# Altium PCB bmsSlave.PcbDoc (part 1 of 2)
Units mil, origin at the board's own origin, x right, y up, seen from the top; angles counter-clockwise.
Board outline 5031.62 x 7216.44 mil, 2 copper layers (Top Layer, Bottom Layer); 233 components, 161 nets, 594 pads, 117 vias.
Unrouted connection lines stored in the file: 5.
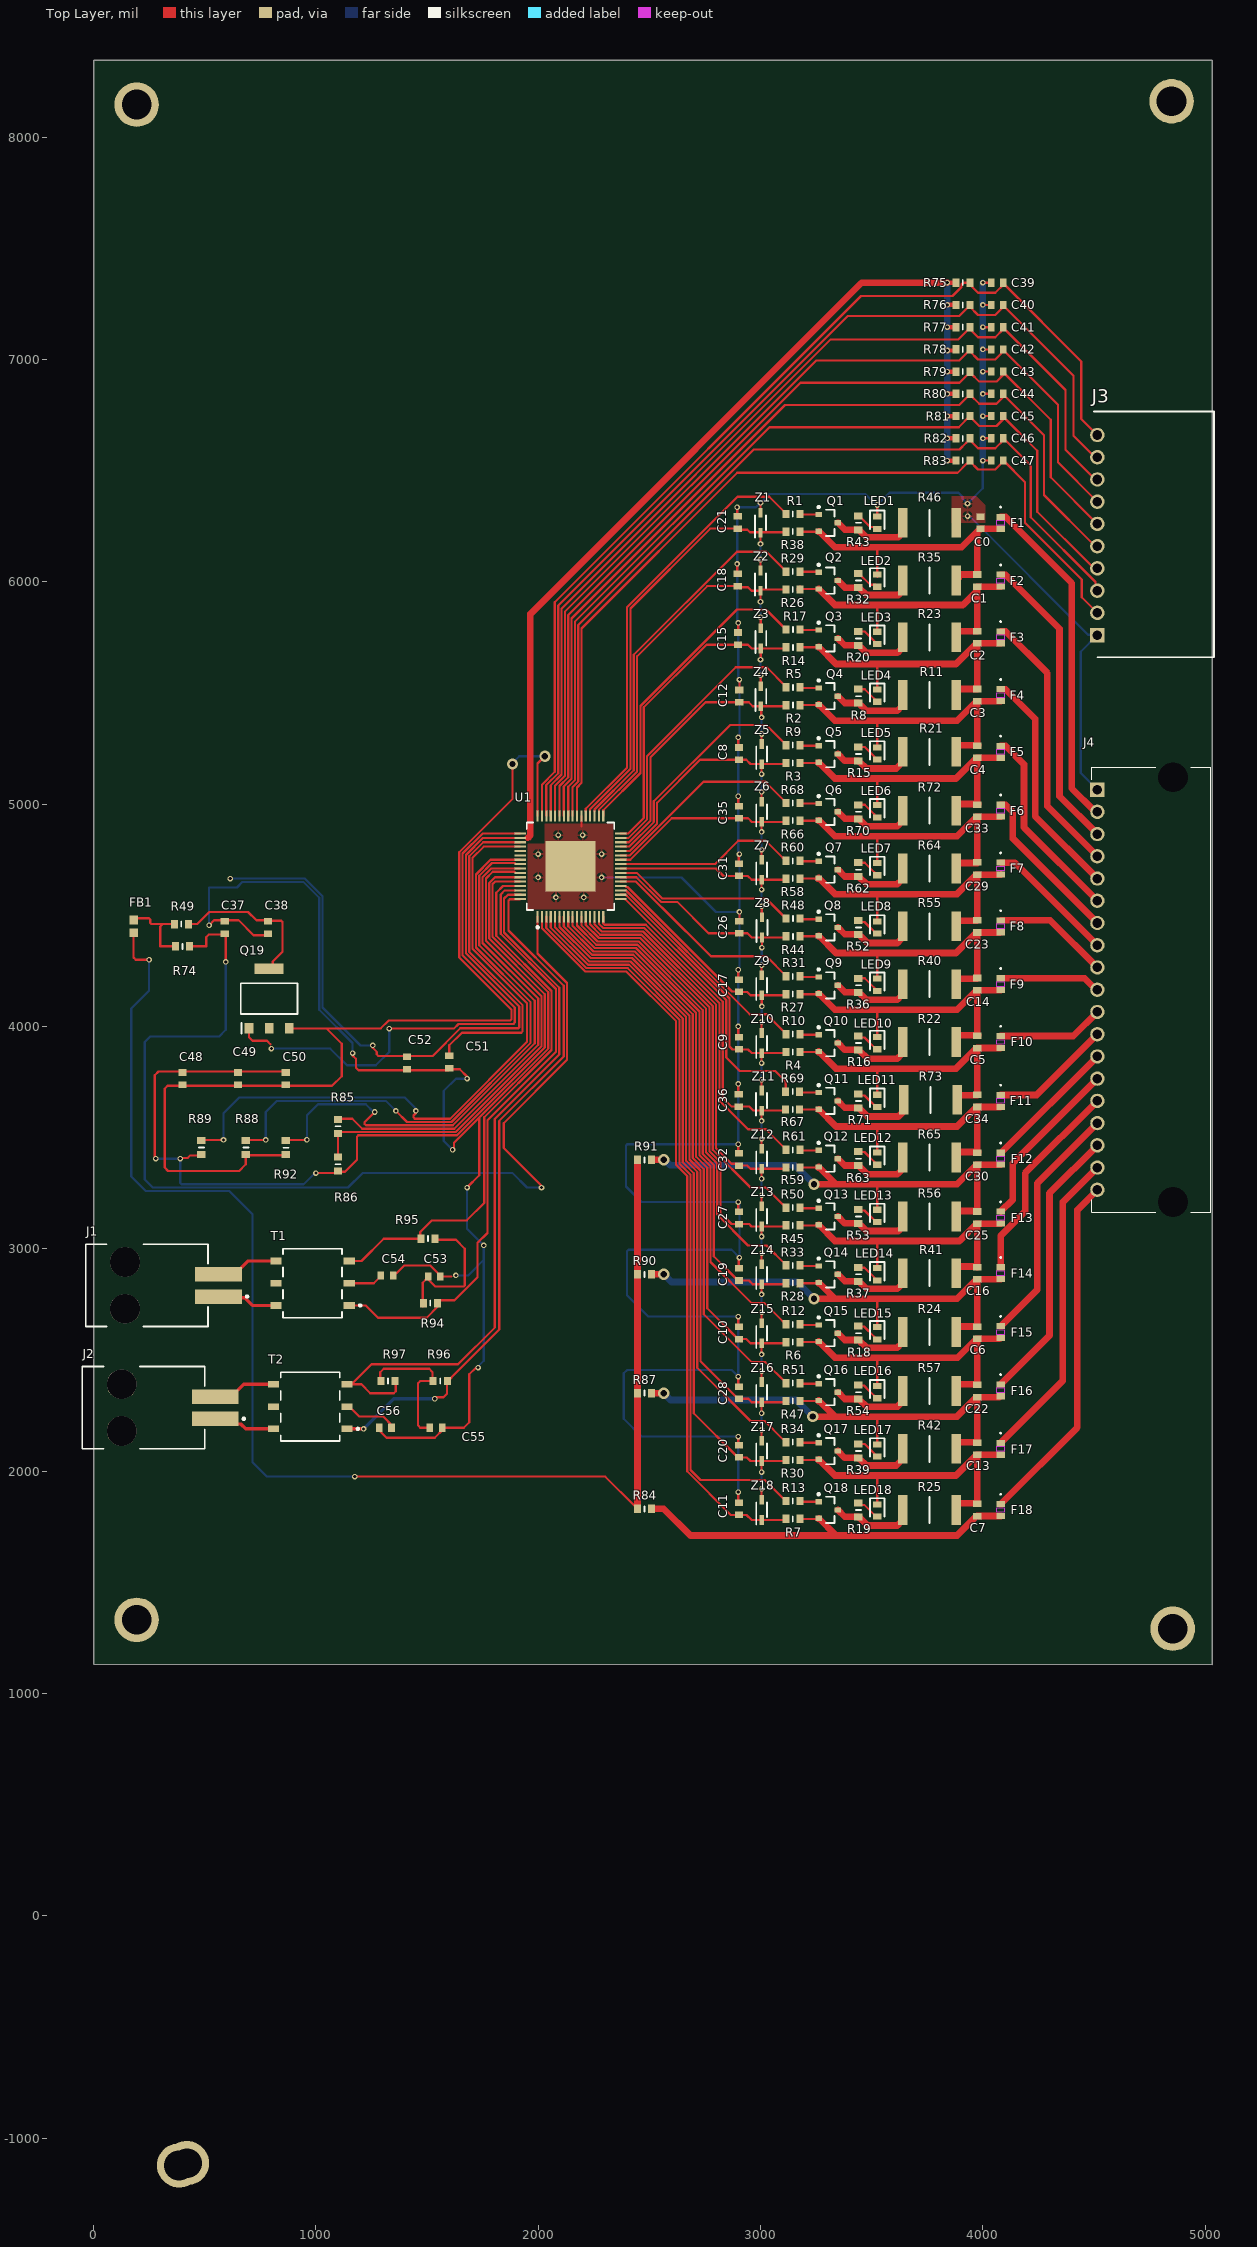
[diagram p0: Top Layer view]
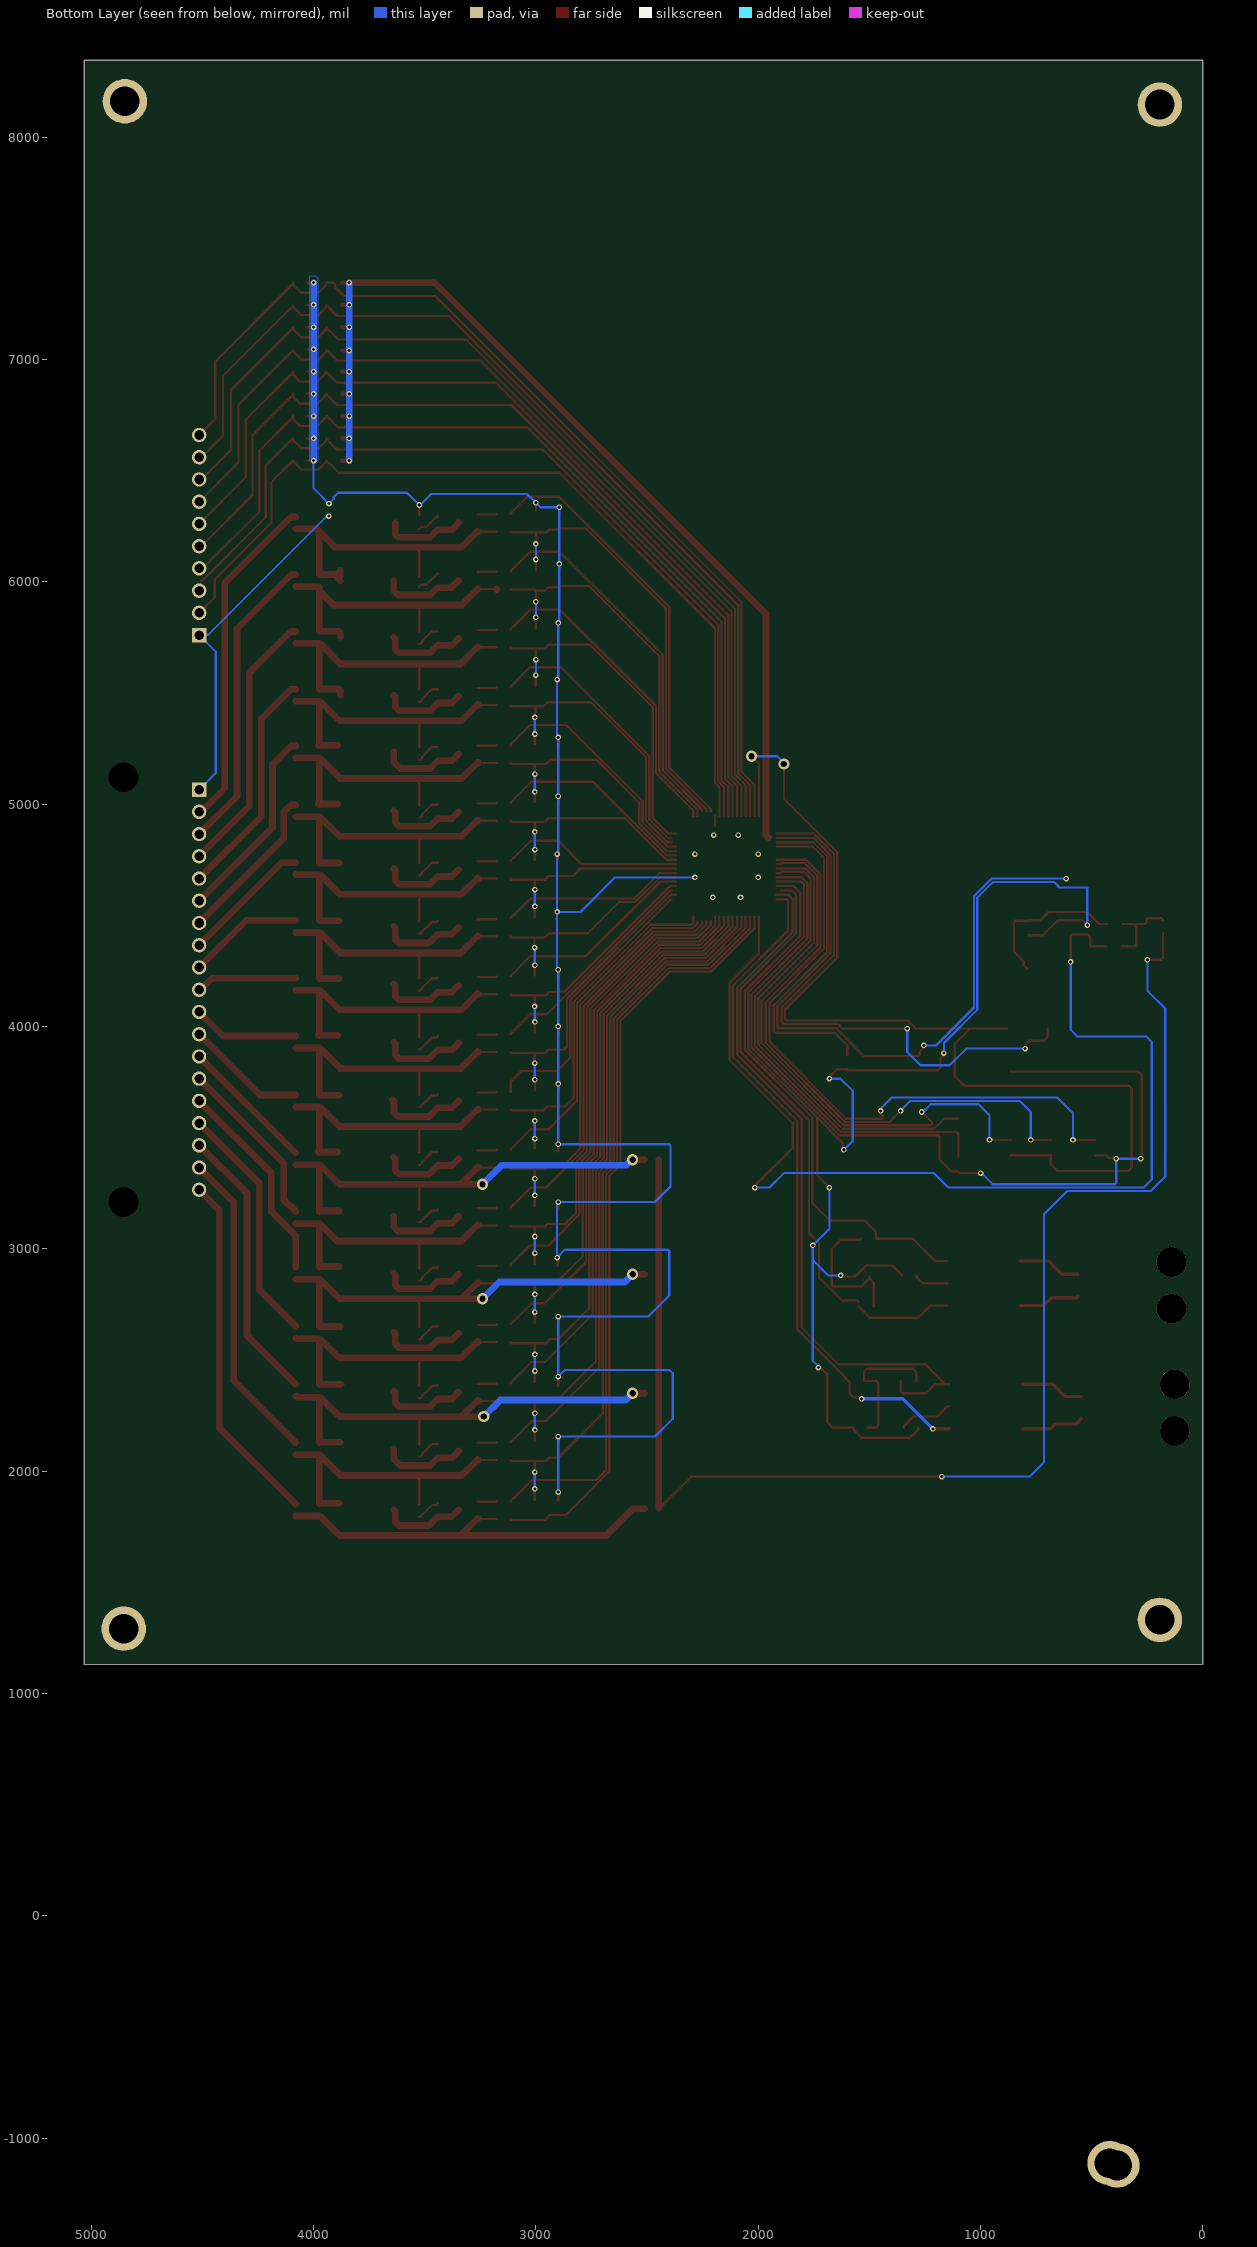
[diagram p1: Bottom Layer view, seen from below]
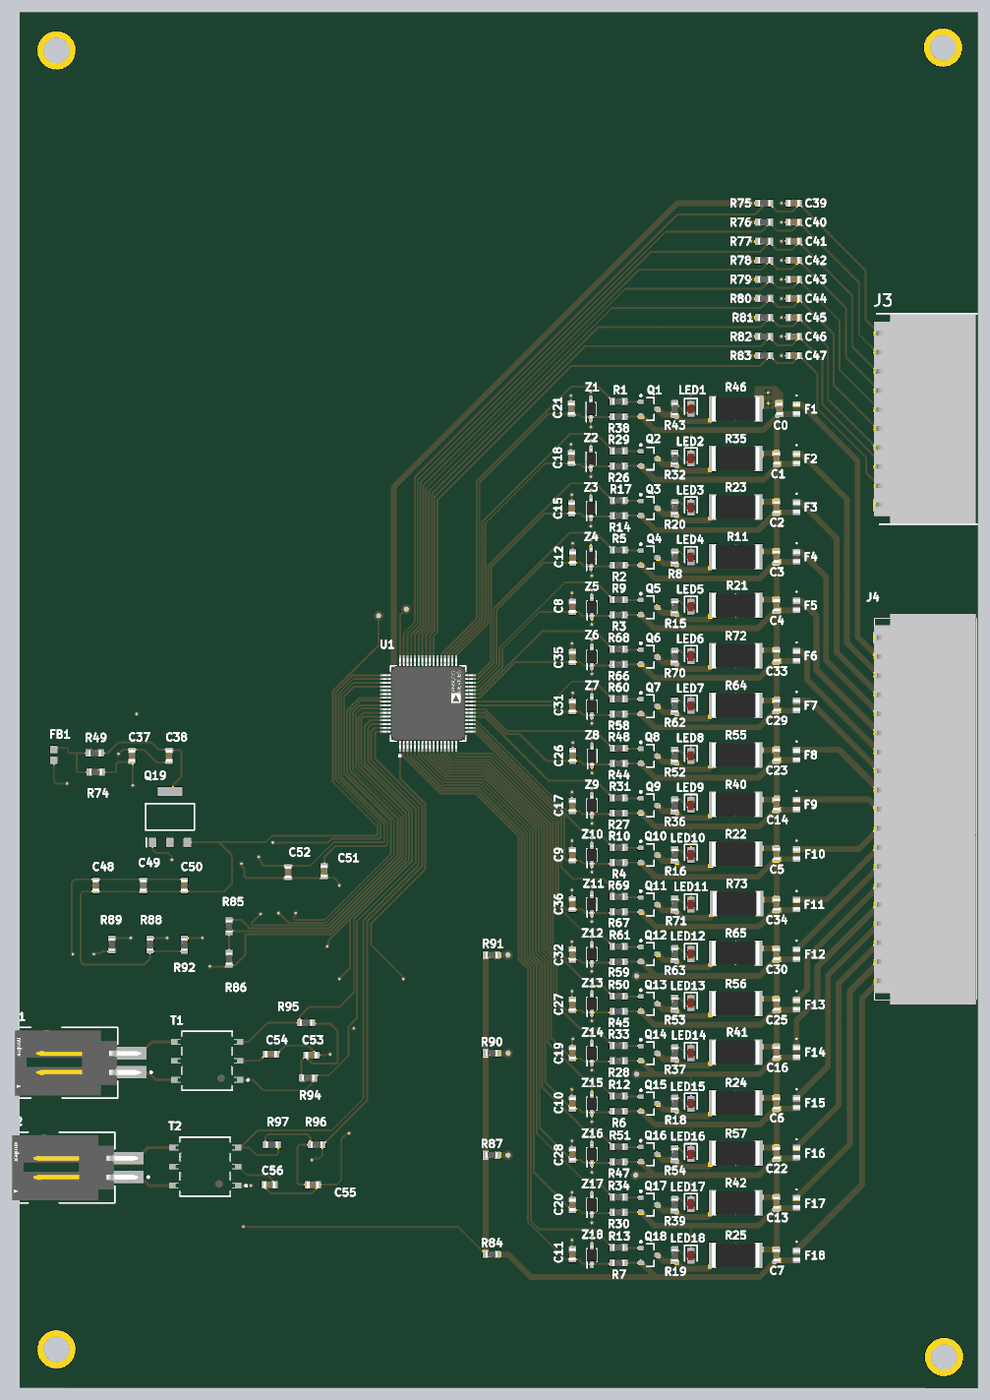
[diagram p3: 3D render of the assembled board from above, using the file's embedded part models]

## Layer stack, top to bottom
Top Solder: solder mask 0.4, Solder Resist, Dk 3.5
Top Layer: signal copper 1.4
Dielectric 1: dielectric 12.6, FR-4, Dk 4.8
Bottom Layer: signal copper 1.4
Bottom Solder: solder mask 0.4, Solder Resist, Dk 3.5

## Board outline
0,1130 0,8345 5031.62,8345 5031.62,1128.56

## Design rules (kind name [scope] priority, off if disabled: settings)
Clearance [All] p1: gap=10 ignorepadtopadclearanceinfootprint=FALSE except(0: Arc-Hole Track-Poly Track-Region Track-Hole SMDPad-Poly SMDPad-Region SMDPad-Hole THPad-Hole Via-Hole Fill-Hole Poly-Hole Region-Hole Text-Hole; 2: Arc-SMDPad Track-SMDPad; 3: SMDPad-SMDPad SMDPad-THPad THPad-THPad; 5: Arc-Arc Arc-Track Track-Track)
DiffPairsRouting [All] p1: maxlimit=10 minlimit=10 mostfreqgap=10 toplayer_minwidth=15 toplayer_maxwidth=15 toplayer_prefwidth=15 bottomlayer_minwidth=15 bottomlayer_maxwidth=15 bottomlayer_prefwidth=15 maxuncoupledlength=500
PolygonConnect [All] p1: thpad.connectstyle=Direct thpad.reliefconductorwidth=10 thpad.reliefentries=4 thpad.polygonreliefangle="90 Angle" thpad.airgapwidth=10 smdpad.connectstyle=Direct smdpad.reliefconductorwidth=10 smdpad.reliefentries=4 smdpad.polygonreliefangle="90 Angle" smdpad.airgapwidth=10 via.connectstyle=Relief via.reliefconductorwidth=10 via.reliefentries=4 via.polygonreliefangle="90 Angle" via.airgapwidth=10
RoutingVias [All] p1: holewidth=28 width=50 viastyle="Through Hole" minholewidth=28 minwidth=50 maxholewidth=28 maxwidth=50
SolderMaskExpansion SolderMaskExpansion_Via [IsVia] p1: expansion=4 istentingtop=TRUE
SolderMaskExpansion [All] p2: expansion=4 istentingtop=FALSE
Width [All] p1: maxlimit=30 minlimit=10 preferedwidth=10 minimp=50.000000 maximp=50.000000 favimp=50.000000
29 further rules are at their usual default settings.

## Classes and differential pairs
component class bmsSlave_main: C37 C38 C39 C40 C41 C42 C43 C44 C45 C46 C48 C49 C50 C51 C52 FB1 Q19 R49 R74 R75 R76 R77 R78 R79 R80 R81 R82 R83 R84 R85 R86 R87 R88 R89 R90 R91 R92
component class bmsSlave_isospi: C53 C54 C55 C56 R94 R95 R96 R97 T1 T2
component class bmsSlave_conn: J1 J2 J3 J4
component class bmsSlave_cells: C0 C1 C2 C3 C4 C5 C6 C7 C8 C9 C10 C11 C12 C13 C14 C15 C16 C17 C18 C19 C20 C21 C22 C23 C25 C26 C27 C28 C29 C30 C31 C32 C33 C34 C35 C36 C57 D1 D2 D3 D4 D5 D6 D7 D8 D9 D10 D11 D12 D13 D14 D15 D16 D17 D18 F1 F2 F3 F4 F5 F6 F7 F8 F9 F10 F11 F12 F13 F14 F15 F16 F17 F18 LED1 LED2 LED3 LED4 LED5 LED6 LED7 LED8 LED9 LED10 LED11 LED12 LED13 LED14 LED15 LED16 LED17 LED18 Q1 Q2 Q3 Q4 Q5 Q6 Q7 Q8 Q9 Q10 Q11 Q12 Q13 Q14 Q15 Q16 Q17 Q18 R1 R2 R3 R4 R5 R6 R7 R8 R9 R10 R11 R12 R13 R14 R15 R16 R17 R18 R19 R20 R21 R22 R23 R24 R25 R26 R27 R28 R29 R30 R31 R32 R33 R34 R35 R36 R37 R38 R39 R40 R41 R42 R43 R44 R45 R46 R47 R48 R50 R51 R52 R53 R54 R55 R56 R57 R58 R59 R60 R61 R62 R63 R64 R65 R66 R67 R68 R69 R70 R71 R72 R73 Z1 Z2 Z3 Z4 Z5 Z6 Z7 Z8 Z9 Z10 Z11 Z12 Z13 Z14 Z15 Z16 Z17 Z18
differential pair ISO_xA_B: +ISO_xA_B_P -ISO_xA_B_N
differential pair ISO_xA_A: +ISO_xA_A_P -ISO_xA_A_N
differential pair ISO_Ix_B: +ISO_Ix_B_P -ISO_Ix_B_N
differential pair ISO_Ix_A: +ISO_Ix_A_P -ISO_Ix_A_N

## Components (designator, comment, footprint, x,y, rotation, side; value= is the part's Value field where it differs from the comment)
C0 "885382207009" C0603 3990,6265 r270 top
C1 "885382207009" C0603 3975,6005 r270 top
C2 "885382207009" C0603 3975,5750 r270 top
C3 "885382207009" C0603 3975,5490 r270 top
C4 "885382207009" C0603 3975,5235 r270 top
C5 "885382207009" C0603 3975,3930 r270 top
C6 "885382207009" C0603 3975,2622.44 r270 top
C7 "885382207009" C0603 3975,1825 r270 top
C8 "885382207009" C0603 2902.72,5226.94 r270 top
C9 "885382207009" C0603 2902.72,3923.89 r270 top
C10 "885382207009" C0603 2902.72,2621.11 r270 top
C11 "885382207009" C0603 2902.72,1830.28 r270 top
C12 "885382207009" C0603 2904.21,5485.56 r270 top
C13 "885382207009" C0603 3975,2100 r270 top
C14 "885382207009" C0603 3975,4190 r270 top
C15 "885382207009" C0603 2899.21,5744.17 r270 top
C16 "885382207009" C0603 3975,2890 r270 top
C17 "885382207009" C0603 2902.72,4182.5 r270 top
C18 "885382207009" C0603 2897.72,6007.78 r270 top
C19 "885382207009" C0603 2902.72,2884.72 r270 top
C20 "885382207009" C0603 2902.72,2088.89 r270 top
C21 "885382207009" C0603 2897.72,6266.39 r270 top
C22 "885382207009" C0603 3975,2360 r270 top
C23 "885382207009" C0603 3975,4450 r270 top
C25 "885382207009" C0603 3975,3140 r270 top
C26 "885382207009" C0603 2904.21,4446.11 r270 top
C27 "885382207009" C0603 2902.72,3138.33 r270 top
C28 "885382207009" C0603 2902.72,2352.5 r270 top
C29 "885382207009" C0603 3975,4710 r270 top
C30 "885382207009" C0603 3975,3405 r270 top
C31 "885382207009" C0603 2902.72,4704.45 r270 top
C32 "885382207009" C0603 2902.72,3401.67 r270 top
C33 "885382207009" C0603 3975,4970 r270 top
C34 "885382207009" C0603 3975,3665 r270 top
C35 "885382207009" C0603 2902.72,4963.33 r270 top
C36 "885382207009" C0603 2902.51,3666.75 r270 top
C37 "Capacitor" C0603 590,4445 r90 top value=0.1uF
C38 "Capacitor" C0603 785,4445 r270 top value=0.1uF
C39 "Capacitor" C0603 4065,7345 r180 top value=0.1uF
C40 "Capacitor" C0603 4065,7245 r180 top value=0.1uF
C41 "Capacitor" C0603 4065,7145 r180 top value=0.1uF
C42 "Capacitor" C0603 4065,7045 r180 top value=0.1uF
C43 "Capacitor" C0603 4065,6945 r180 top value=0.1uF
C44 "Capacitor" C0603 4065,6845 r180 top value=0.1uF
C45 "Capacitor" C0603 4065,6745 r180 top value=0.1uF
C46 "Capacitor" C0603 4065,6645 r180 top value=0.1uF
C47 "Capacitor" C0603 4065,6545 r180 top value=0.1uF
C48 "Capacitor" C0603 400,3765 r90 top value=1uF
C49 "Capacitor" C0603 650,3765 r90 top value=1uF
C50 "Capacitor" C0603 865,3765 r90 top value=1uF
C51 "Capacitor" C0603 1600,3840 r270 top value=1uF
C52 "Capacitor" C0603 1410,3835 r270 top value=1uF
C53 "885382207009" C0603 1532.28,2875 r180 top
C54 "885382207009" C0603 1320,2880 r0 top
C55 "885382207009" C0603 1540,2195 r180 top
C56 "885382207009" C0603 1312.72,2195 r180 top
F1 "MFU0603FF00500P500" FUS_VISHAY_MFU0603_VIS 4080,6265 r270 top
F2 "MFU0603FF00500P500" FUS_VISHAY_MFU0603_VIS 4080,6005 r270 top
F3 "MFU0603FF00500P500" FUS_VISHAY_MFU0603_VIS 4080,5750 r270 top
F4 "MFU0603FF00500P500" FUS_VISHAY_MFU0603_VIS 4080,5490 r270 top
F5 "MFU0603FF00500P500" FUS_VISHAY_MFU0603_VIS 4080,5235 r270 top
F6 "MFU0603FF00500P500" FUS_VISHAY_MFU0603_VIS 4080,4970 r270 top
F7 "MFU0603FF00500P500" FUS_VISHAY_MFU0603_VIS 4080,4710 r270 top
F8 "MFU0603FF00500P500" FUS_VISHAY_MFU0603_VIS 4080,4450 r270 top
F9 "MFU0603FF00500P500" FUS_VISHAY_MFU0603_VIS 4080,4190 r270 top
F10 "MFU0603FF00500P500" FUS_VISHAY_MFU0603_VIS 4080,3930 r270 top
F11 "MFU0603FF00500P500" FUS_VISHAY_MFU0603_VIS 4080,3665 r270 top
F12 "MFU0603FF00500P500" FUS_VISHAY_MFU0603_VIS 4080,3405 r270 top
F13 "MFU0603FF00500P500" FUS_VISHAY_MFU0603_VIS 4080,3140 r270 top
F14 "MFU0603FF00500P500" FUS_VISHAY_MFU0603_VIS 4080,2890 r270 top
F15 "MFU0603FF00500P500" FUS_VISHAY_MFU0603_VIS 4080,2625 r270 top
F16 "MFU0603FF00500P500" FUS_VISHAY_MFU0603_VIS 4080,2363.25 r270 top
F17 "MFU0603FF00500P500" FUS_VISHAY_MFU0603_VIS 4080,2100 r270 top
F18 "MFU0603FF00500P500" FUS_VISHAY_MFU0603_VIS 4080,1825 r270 top
FB1 "BLM18PG330SN1D" BEADC1608X95N 180,4450 r90 top
J1 "15-91-2025" FP-15-91-2025-MFG 240,2835 r270 top
J2 "15-91-2025" FP-15-91-2025-MFG 225,2285 r270 top
J3 "70553-0044" 705550044 4515,5760 r270 top
J4 "70555-0018" 705550018 4515,5065 r90 top
LED1 "LS_L29K-G1H2-1" LEDC1308X67N 3525,6265 r270 top
LED2 "LS_L29K-G1H2-1" LEDC1308X67N 3525,6005 r270 top
LED3 "LS_L29K-G1H2-1" LEDC1308X67N 3525,5747.56 r270 top
LED4 "LS_L29K-G1H2-1" LEDC1308X67N 3525,5487.56 r270 top
LED5 "LS_L29K-G1H2-1" LEDC1308X67N 3525,5227.44 r270 top
LED6 "LS_L29K-G1H2-1" LEDC1308X67N 3525,4967.56 r270 top
LED7 "LS_L29K-G1H2-1" LEDC1308X67N 3525,4707.56 r270 top
LED8 "LS_L29K-G1H2-1" LEDC1308X67N 3525,4445 r270 top
LED9 "LS_L29K-G1H2-1" LEDC1308X67N 3525,4187.44 r270 top
LED10 "LS_L29K-G1H2-1" LEDC1308X67N 3525,3925 r270 top
LED11 "LS_L29K-G1H2-1" LEDC1308X67N 3525,3665 r270 top
LED12 "LS_L29K-G1H2-1" LEDC1308X67N 3525,3405 r270 top
LED13 "LS_L29K-G1H2-1" LEDC1308X67N 3525,3147.56 r270 top
LED14 "LS_L29K-G1H2-1" LEDC1308X67N 3525,2885 r270 top
LED15 "LS_L29K-G1H2-1" LEDC1308X67N 3525,2620 r270 top
LED16 "LS_L29K-G1H2-1" LEDC1308X67N 3525,2355 r270 top
LED17 "LS_L29K-G1H2-1" LEDC1308X67N 3525,2092.56 r270 top
LED18 "LS_L29K-G1H2-1" LEDC1308X67N 3525,1822.44 r270 top
Q1 "BSS308PE" INF-PG-SOT23_L 3305,6265 r0 top
Q2 "BSS308PE" INF-PG-SOT23_L 3305,6005 r0 top
Q3 "BSS308PE" INF-PG-SOT23_L 3305,5745 r0 top
Q4 "BSS308PE" INF-PG-SOT23_L 3305,5485 r0 top
Q5 "BSS308PE" INF-PG-SOT23_L 3305,5225 r0 top
Q6 "BSS308PE" INF-PG-SOT23_L 3305,4965 r0 top
Q7 "BSS308PE" INF-PG-SOT23_L 3305,4705 r0 top
Q8 "BSS308PE" INF-PG-SOT23_L 3305,4445 r0 top
Q9 "BSS308PE" INF-PG-SOT23_L 3305,4185 r0 top
Q10 "BSS308PE" INF-PG-SOT23_L 3305,3925 r0 top
Q11 "BSS308PE" INF-PG-SOT23_L 3305,3665 r0 top
Q12 "BSS308PE" INF-PG-SOT23_L 3305,3405 r0 top
Q13 "BSS308PE" INF-PG-SOT23_L 3305,3145 r0 top
Q14 "BSS308PE" INF-PG-SOT23_L 3305,2885 r0 top
Q15 "BSS308PE" INF-PG-SOT23_L 3305,2620 r0 top
Q16 "BSS308PE" INF-PG-SOT23_L 3305,2355 r0 top
Q17 "BSS308PE" INF-PG-SOT23_L 3305,2090 r0 top
Q18 "BSS308PE" INF-PG-SOT23_L 3305,1825 r0 top
Q19 "NSV1C201MZ4T1G" SOT230P700X175-4N 790,4125 r90 top
R1 "Resistor" R0603 3145,6305 r0 top value=1K
R2 "Resistor" R0603 3146.5,5445 r0 top value=1K
R3 "Resistor" R0603 3145,5185 r0 top value=1K
R4 "Resistor" R0603 3145,3885 r0 top value=1K
R5 "Resistor" R0603 3146.5,5525 r0 top value=1K
R6 "Resistor" R0603 3145,2580 r0 top value=1K
R7 "Resistor" R0603 3145,1785 r0 top value=1K
R8 "Resistor" R0603 3440,5485 r90 top value=1K
R9 "Resistor" R0603 3145,5265 r0 top value=1K
R10 "Resistor" R0603 3145,3965 r0 top value=1K
R11 "Resistor" R2512 3760,5490 r0 top value=27
R12 "Resistor" R0603 3145,2660 r0 top value=1K
R13 "Resistor" R0603 3145,1865 r0 top value=1K
R14 "Resistor" R0603 3146.5,5705 r0 top value=1K
R15 "Resistor" R0603 3440,5225 r90 top value=1K
R16 "Resistor" R0603 3440,3925 r90 top value=1K
R17 "Resistor" R0603 3146.5,5785 r0 top value=1K
R18 "Resistor" R0603 3440,2620 r90 top value=1K
R19 "Resistor" R0603 3440,1825 r90 top value=1K
R20 "Resistor" R0603 3440,5745 r90 top value=1K
R21 "Resistor" R2512 3760,5235 r0 top value=27
R22 "Resistor" R2512 3760,3930 r0 top value=27
R23 "Resistor" R2512 3760,5750 r0 top value=27
R24 "Resistor" R2512 3760,2625 r0 top value=27
R25 "Resistor" R2512 3760,1825 r0 top value=27
R26 "Resistor" R0603 3145,5965 r0 top value=1K
R27 "Resistor" R0603 3145,4145 r0 top value=1K
R28 "Resistor" R0603 3145,2845 r0 top value=1K
R29 "Resistor" R0603 3145,6045 r0 top value=1K
R30 "Resistor" R0603 3145,2050 r0 top value=1K
R31 "Resistor" R0603 3145,4225 r0 top value=1K
R32 "Resistor" R0603 3440,6005 r90 top value=1K
R33 "Resistor" R0603 3145,2925 r0 top value=1K
R34 "Resistor" R0603 3145,2130 r0 top value=1K
R35 "Resistor" R2512 3760,6005 r0 top value=27
R36 "Resistor" R0603 3440,4185 r90 top value=1K
R37 "Resistor" R0603 3440,2885 r90 top value=1K
R38 "Resistor" R0603 3145,6225 r0 top value=1K
R39 "Resistor" R0603 3440,2090 r90 top value=1K
R40 "Resistor" R2512 3760,4190 r0 top value=27
R41 "Resistor" R2512 3760,2890 r0 top value=27
R42 "Resistor" R2512 3760,2100 r0 top value=27
R43 "Resistor" R0603 3440,6265 r90 top value=1K
R44 "Resistor" R0603 3146.5,4405 r0 top value=1K
R45 "Resistor" R0603 3145,3105 r0 top value=1K
R46 "Resistor" R2512 3760,6265 r0 top value=27
R47 "Resistor" R0603 3145,2315 r0 top value=1K
R48 "Resistor" R0603 3146.5,4485 r0 top value=1K
R49 "Resistor" R0603 395,4460 r0 top value=100
R50 "Resistor" R0603 3145,3185 r0 top value=1K
R51 "Resistor" R0603 3145,2395 r0 top value=1K
R52 "Resistor" R0603 3440,4445 r90 top value=1K
R53 "Resistor" R0603 3440,3145 r90 top value=1K
R54 "Resistor" R0603 3440,2355 r90 top value=1K
R55 "Resistor" R2512 3760,4450 r0 top value=27
R56 "Resistor" R2512 3760,3145 r0 top value=27
R57 "Resistor" R2512 3760.08,2360 r0 top value=27
R58 "Resistor" R0603 3145,4664.72 r0 top value=1K
R59 "Resistor" R0603 3145,3365 r0 top value=1K
R60 "Resistor" R0603 3145,4744.72 r0 top value=1K
R61 "Resistor" R0603 3145,3445 r0 top value=1K
R62 "Resistor" R0603 3440,4705 r90 top value=1K
R63 "Resistor" R0603 3440,3405 r90 top value=1K
R64 "Resistor" R2512 3760,4710 r0 top value=27
R65 "Resistor" R2512 3760,3410 r0 top value=27
R66 "Resistor" R0603 3145,4925 r0 top value=1K
R67 "Resistor" R0603 3144.79,3626.48 r0 top value=1K
R68 "Resistor" R0603 3145,5005 r0 top value=1K
R69 "Resistor" R0603 3144.79,3706.48 r0 top value=1K
R70 "Resistor" R0603 3440,4965 r90 top value=1K
R71 "Resistor" R0603 3440,3665 r90 top value=1K
R72 "Resistor" R2512 3760,4970 r0 top value=27
R73 "Resistor" R2512 3765,3670 r0 top value=27
R74 "Resistor" R0603 400,4360 r0 top value=100
R75 "Resistor" R0603 3910,7345 r180 top value=100k
R76 "Resistor" R0603 3910,7245 r180 top value=100k
R77 "Resistor" R0603 3910,7145 r180 top value=100k
R78 "Resistor" R0603 3910,7045 r180 top value=100k
R79 "Resistor" R0603 3910,6945 r180 top value=100k
R80 "Resistor" R0603 3910,6845 r180 top value=100k
R81 "Resistor" R0603 3910,6745 r180 top value=100k
R82 "Resistor" R0603 3910,6645 r180 top value=100k
R83 "Resistor" R0603 3910,6545 r180 top value=100k
R84 "Resistor" R0603 2478.5,1830 r180 top value=0
R85 "Resistor" R0603 1100,3550.48 r90 top value=1.2k
R86 "Resistor" R0603 1100,3380.48 r270 top value=806
R87 "Resistor" R0603 2478.5,2350 r180 top value=0
R88 "Resistor" R0603 685,3455 r90 top value=0
R89 "Resistor" R0603 485,3455 r90 top value=0
R90 "Resistor" R0603 2478.5,2885 r180 top value=0
R91 "Resistor" R0603 2478.5,3400 r180 top value=0
R92 "Resistor" R0603 865,3454.52 r90 top value=1M
R94 "Resistor" R0603 1515,2755 r180 top value=59.4
R95 "Resistor" R0603 1504.52,3045 r180 top value=59.4
R96 "Resistor" R0603 1559.52,2405 r180 top value=59.4
R97 "Resistor" R0603 1324.52,2405 r0 top value=59.4
T1 "SM91502ALE" FP-SM91502ALE-MFG 985.04,2845 r180 top
T2 "SM91502ALE" FP-SM91502ALE-MFG 975,2290 r180 top
U1 "LTC6813HLWE-1#3ZZPBF" FP-LWE-64-05-08-1982-MFG 2145,4720 r90 top
Z1 "PDZ7.5B,115" SOD2512X110N 3000,6265 r90 top
Z2 "PDZ7.5B,115" SOD2512X110N 3000,6005 r90 top
Z3 "PDZ7.5B,115" SOD2512X110N 3001.5,5745 r90 top
Z4 "PDZ7.5B,115" SOD2512X110N 3001.5,5484.72 r90 top
Z5 "PDZ7.5B,115" SOD2512X110N 3005,5225 r90 top
Z6 "PDZ7.5B,115" SOD2512X110N 3005,4965 r90 top
Z7 "PDZ7.5B,115" SOD2512X110N 3005,4704.72 r90 top
Z8 "PDZ7.5B,115" SOD2512X110N 3006.5,4445 r90 top
Z9 "PDZ7.5B,115" SOD2512X110N 3005,4185 r90 top
Z10 "PDZ7.5B,115" SOD2512X110N 3005,3925 r90 top
Z11 "PDZ7.5B,115" SOD2512X110N 3004.79,3666.48 r90 top
Z12 "PDZ7.5B,115" SOD2512X110N 3005,3405 r90 top
Z13 "PDZ7.5B,115" SOD2512X110N 3005,3145.28 r90 top
Z14 "PDZ7.5B,115" SOD2512X110N 3005,2885.28 r90 top
Z15 "PDZ7.5B,115" SOD2512X110N 3005,2620.28 r90 top
Z16 "PDZ7.5B,115" SOD2512X110N 3005,2355.28 r90 top
Z17 "PDZ7.5B,115" SOD2512X110N 3005,2090.28 r90 top
Z18 "PDZ7.5B,115" SOD2512X110N 3005,1825.28 r90 top

## Footprints (in the part's own frame and the unit in brackets; to place one, negate y for a bottom-side part, rotate by r counter-clockwise, add the part's x,y. Pads: shape width x height; smd on the part's side, far side on the other; paste and mask are expansions set on the pad)
705550018 [mm]
  rect 1.635x1.635 hole 1.09: 1(0,0)
  round 1.635 hole 1.09: 2(-2.54,0) 3(-5.08,0) 4(-7.62,0) 5(-10.16,0) 6(-12.7,0) 7(-15.24,0) 8(-17.78,0) 9(-20.32,0) 10(-22.86,0) 11(-25.4,0) 12(-27.94,0) 13(-30.48,0) 14(-33.02,0) 15(-35.56,0) 16(-38.1,0) 17(-40.64,0) 18(-43.18,0) 19(-45.72,0)
  round 1.7 hole 3.4 unplated: MH1(1.4,-8.64) MH2(-47.12,-8.64)
  silkscreen extent -48.27,-12.94 2.55,0.65, body extent -48.89,-12.86 3.18,0.73, height 6.56
705550044 [mm]
  rect 1.65x1.65 hole 1.1: 1(0,0)
  round 1.65 hole 1.1: 2(-2.54,0) 3(-5.08,0) 4(-7.62,0) 5(-10.16,0) 6(-12.7,0) 7(-15.24,0) 8(-17.78,0) 9(-20.32,0) 10(-22.86,0)
  silkscreen extent -25.54,-0.38 2.55,13.34, body extent -25.46,-0.75 2.48,12.84, height 6.98
BEADC1608X95N [mm]
  rect 1x0.97 smd: 1(-0.735,0) 2(0.735,0)
C0603 [mm]
  rect 0.75x0.94 smd: 1(-0.7,0) 2(0.7,0)
  body extent -0.8,-0.45 0.8,0.45, height 0.8
FP-15-91-2025-MFG [mm]
  rect 1.65x5.33 smd paste+0 mask+0: 1(1.27,8.19) 2(-1.27,8.19)
  round 3.4 hole 3.4 unplated paste-2539.97 mask+0: ""(-2.67,-2.5) ""(2.67,-2.5)
  silkscreen extent -4.7,-6.99 4.7,11.58, body extent -4.8,-7.09 4.8,10.95, height 0.25
FP-LWE-64-05-08-1982-MFG [mm]
  rect 1.3x0.25 smd paste+0 mask+0: 1(-5.75,3.75) 2(-5.75,3.25) 3(-5.75,2.75) 4(-5.75,2.25) 5(-5.75,1.75) 6(-5.75,1.25) 7(-5.75,0.75) 8(-5.75,0.25) 9(-5.75,-0.25) 10(-5.75,-0.75) 11(-5.75,-1.25) 12(-5.75,-1.75) 13(-5.75,-2.25) 14(-5.75,-2.75) 15(-5.75,-3.25) 16(-5.75,-3.75) 33(5.75,-3.75) 34(5.75,-3.25) 35(5.75,-2.75) 36(5.75,-2.25) 37(5.75,-1.75) 38(5.75,-1.25) 39(5.75,-0.75) 40(5.75,-0.25) 41(5.75,0.25) 42(5.75,0.75) 43(5.75,1.25) 44(5.75,1.75) 45(5.75,2.25) 46(5.75,2.75) 47(5.75,3.25) 48(5.75,3.75)
  rect 0.25x1.3 smd paste+0 mask+0: 17(-3.75,-5.75) 18(-3.25,-5.75) 19(-2.75,-5.75) 20(-2.25,-5.75) 21(-1.75,-5.75) 22(-1.25,-5.75) 23(-0.75,-5.75) 24(-0.25,-5.75) 25(0.25,-5.75) 26(0.75,-5.75) 27(1.25,-5.75) 28(1.75,-5.75) 29(2.25,-5.75) 30(2.75,-5.75) 31(3.25,-5.75) 32(3.75,-5.75) 49(3.75,5.75) 50(3.25,5.75) 51(2.75,5.75) 52(2.25,5.75) 53(1.75,5.75) 54(1.25,5.75) 55(0.75,5.75) 56(0.25,5.75) 57(-0.25,5.75) 58(-0.75,5.75) 59(-1.25,5.75) 60(-1.75,5.75) 61(-2.25,5.75) 62(-2.75,5.75) 63(-3.25,5.75) 64(-3.75,5.75)
  rect 5.74x5.74 smd paste+0 mask+0: 65(0,0)
  silkscreen extent -7.1,-5 5,5, body extent -6.5,-6.5 6.5,6.5, height 0.25
FP-SM91502ALE-MFG [mm]
  rect 1.27x0.76 smd paste+0 mask+0: 1(-4.19,2.54) 2(-4.19,0) 3(-4.19,-2.54) 4(4.19,-2.54) 5(4.19,0) 6(4.19,2.54)
  silkscreen extent -5.57,-3.94 3.36,3.94, body extent -4.92,-4.04 4.92,4.04, height 0.25
FUS_VISHAY_MFU0603_VIS [mil]
  rect 27.5x37 smd paste+0 mask+0: 1(-26.75,0) 2(26.75,0)
  Top Layer keep-out region: -11,-16.5 -11,16.5 11,16.5 11,-16.5
  silkscreen extent -73,-3 -68,3, body extent -31,-19 31,19, height 22
INF-PG-SOT23_L [mm] "SOT23, 3-Leads, Body 2.9x1.3mm, Pitch 0.95mm, IPC High Density"
  rect 0.75x0.6 smd: 1(-1.1,0.95) 2(-1.1,-0.95) 3(1.1,0)
  silkscreen extent -1.22,-1.5 0.7,1.92, body extent -0.7,-1.5 0.7,1.5, height 1.1
LEDC1308X67N [mm]
  rect 0.7x0.95 smd: 1(-0.7,0) 2(0.7,0)
  silkscreen extent -1.4,-0.82 0.7,0.82, body extent -0.85,-0.4 0.85,0.4, height 0.67
R0603 [mm]
  rect 0.8x0.95 smd: 1(-0.8,0) 2(0.8,0)
  silkscreen extent 0,-0.3 0,0.3, body extent -0.8,-0.4 0.8,0.4, height 0.55
R2512 [mm]
  rect 1.1x3.4 smd: 1(-3.05,0) 2(3.05,0)
  silkscreen extent 0,-1.5 0,1.5, body extent -3.17,-1.6 3.17,1.6, height 0.65
SOD2512X110N [mm]
  rect 1.1x0.5 smd: 1(-1.15,0) 2(1.15,0)
  silkscreen extent -1.7,-0.63 0.85,0.63, body extent -1.24,-0.62 1.24,0.63, height 0.93
SOT230P700X175-4N [mm]
  rect 1.2x1 smd: 1(-3.4,2.3) 2(-3.4,0) 3(-3.4,-2.3)
  rect 1.2x3.3 smd: 4(3.4,0)
  silkscreen extent -4,-3.25 1.75,3.25

## Part data
C0 C1 C2 C3 C4 C5 C6 C7 C8 C9 C10 C11 C12 C13 C14 C15 C16 C17 C18 C19 C20 C21 C22 C23 C25 C26 C27 C28 C29 C30 C31 C32 C33 C34 C35 C36 C53 C54 C55 C56: "Multilayer Ceramic Chip Capacitor WCAP-CSST Series 0805 10000pF X7R0805103K100DFCT1S000", Manufacturer_Name="Wurth Elektronik", Mouser Part Number=710-885382207009, Datasheet Link=https://katalog.we-online.com/pbs/datasheet/885382207009.pdf, Geometry.Height=1.35mm, Manufacturer_Part_Number=885382207009, Mouser Price/Stock=https://www.mouser.co.uk/ProductDetail/Wurth-Elektronik/885382207009?qs=0lSvoLzn4L%2FLliJ98PmFYg%3D%3D
F1 F2 F3 F4 F5 F6 F7 F8 F9 F10 F11 F12 F13 F14 F15 F16 F17 F18: "Fuse", Manufacturer_Name=Vishay, Mouser Part Number=594-MFU0603-FF-0.5, Datasheet Link=https://componentsearchengine.com/Datasheets/1/MFU0603FF00500P500.pdf, Height=0.55mm, Manufacturer_Part_Number=MFU0603FF00500P500, Mouser Price/Stock=https://www.mouser.co.uk/ProductDetail/Vishay-Beyschlag/MFU0603FF00500P500?qs=Ok6sVjDQtqZISHXP1RFN1Q%3D%3D
FB1: "Ferrite Bead", Manufacturer_Name="Murata Electronics", Mouser Part Number=81-BLM18PG330SN1D, Arrow Part Number=BLM18PG330SN1D, Arrow Price/Stock=https://www.arrow.com/en/products/blm18pg330sn1d/murata-manufacturing?region=nac, Datasheet Link=http://www.murata.com/~/media/webrenewal/support/library/catalog/products/emc/emifil/c31e.ashx?la=en-gb, Height=0.95mm, Manufacturer_Part_Number=BLM18PG330SN1D, Mouser Price/Stock=https://www.mouser.co.uk/ProductDetail/Murata-Electronics/BLM18PG330SN1D?qs=4Avc3lXqH4bdltMAIp8Scg%3D%3D
J1 J2: library part CMP-04776-000618-1, "CONN HEADER SMD R/A 2POS 2.54MM", Color=Black, Contact Resistance=30mR, Current Rating=3A, Flammability Rating="UL94 V-0", Insulation Resistance=1GR, Max Current Rating=1.75A, Max Operating Temperature=105°C, Min Operating Temperature=-40°C, Package Quantity=1830, Voltage Rating=250V, Contact Gender=Male, Contact Material=Bronze, Contact Mating Length=0.24inch, Contact Plating=Gold, Contact Type="Male Pin", Depth=13.59mm, ELV=Compliant, Gender=Male, Glow Wire Compliant=Non-compliant, Height=5.56mm, Housing Color=Black, Housing Material=Polyester, Lead Free="Contains Lead", Length=8.64mm, Material=Brass, Mount="Surface Mount", Number of Circuits=2, Number of Contacts=2, Number of Positions=2, Number of Rows=1, Orientation="Right Angle", Packaging=Rail/Tube, Pitch=2.54mm, Radiation Hardening=No, REACH SVHC="No SVHC", RoHS Compliant=Yes, Series="C-Grid® SL™ 70634", Termination=Solder, Voltage Rating (DC)=250V
J3: "Connector", Manufacturer_Name=Molex, Mouser Part Number=538-70553-0044, Datasheet Link=https://www.molex.com/pdm_docs/sd/705530044_sd.pdf, Height=7.12mm, Manufacturer_Part_Number=70553-0044, Mouser Price/Stock=https://www.mouser.co.uk/ProductDetail/Molex/70553-0044?qs=MYfYmQ4RRgbAysUAVOcSCQ%3D%3D
J4: "Connector", Manufacturer_Name=Molex, Datasheet Link=https://www.molex.com/pdm_docs/sd/705550018_sd.pdf, Height=7mm, Manufacturer_Part_Number=70555-0018
LED1 LED2 LED3 LED4 LED5 LED6 LED7 LED8 LED9 LED10 LED11 LED12 LED13 LED14 LED15 LED16 LED17 LED18: "LED", Arrow Part Number="LS L29K-G1H2-1", Manufacturer_Name=OSRAM, Mouser Part Number=720-LSL29K-G1H2-1-Z, Arrow Price/Stock=https://www.arrow.com/en/products/ls-l29k-g1h2-1/osram-opto-semiconductors, Datasheet Link=https://dammedia.osram.info/media/resource/hires/osram-dam-5662679/LS%20L29K_EN.pdf, Height=0.67mm, Manufacturer_Part_Number="LS L29K-G1H2-1", Mouser Price/Stock=https://www.mouser.com/Search/Refine.aspx?Keyword=720-LSL29K-G1H2-1-Z
Q1 Q2 Q3 Q4 Q5 Q6 Q7 Q8 Q9 Q10 Q11 Q12 Q13 Q14 Q15 Q16 Q17 Q18: library part CMP-1099-00030-1, "P-Channel OptiMOS P3 Small-Signal-Transistor, -30 V VDS, -2 A ID, -55 to 150 degC, PG-SOT23, Reel, Green", Manufacturer=Infineon, ComponentLink1Description="Manufacturer URL", ComponentLink1URL=http://www.infineon.com/, ComponentLink2Description=Datasheet, ComponentLink2URL=http://www.infineon.com/dgdl/BSS308PE_Rev23_.pdf?folderId=db3a304314dca38901154a72e3951a65&fileId=db3a304330f686060131099c80400073, ComponentLink3Description="Package Specification", ComponentLink3URL=http://www.infineon.com/dgdl/SOT23-Package_Overview.pdf?folderId=db3a30431936bc4b0119532290053c66&fileId=db3a30431936bc4b0119533468123c85, DatasheetVersion="Rev. 2.03", Green=TRUE, Halogen-free=TRUE, ID (max)="-2Â A", IDpuls (max)="-8Â A", Mounting Technology="Surface Mount", PackageDescription="3-Pin Small Outline Transistor Package, 2.9 x 1.3 mm Body, 0.95 mm Pitch", PackageReference=PG-SOT23, PackageVersion=Apr-08, Packing=Reel, PartNumber=BSS308PE, Pto t (max)="0.5Â W", QG="-5Â nC", RDS (on) (max)="80Â mOhm", RDS (on) (max) (@4.5V)="130Â mOhm", Rth="250Â K/W", VDS (max)="-30Â V", VGS(th) (max)="-1Â V", VGS(th) (min)="-2Â V"
Q19: "Transistor", Manufacturer_Name=onsemi, Mouser Part Number=863-NSV1C201MZ4T1G, Arrow Part Number=NSV1C201MZ4T1G, Arrow Price/Stock=https://www.arrow.com/en/products/nsv1c201mz4t1g/on-semiconductor, Datasheet Link=http://www.onsemi.com/pub/Collateral/NSS1C201MZ4-D.PDF, Height=1.75mm, Manufacturer_Part_Number=NSV1C201MZ4T1G, Mouser Price/Stock=https://www.mouser.co.uk/ProductDetail/onsemi/NSV1C201MZ4T1G?qs=abmNkq9no6CNkkQTLXtvJQ%3D%3D
R9: Supplier Part Number=1029290, SimulationGenericComponent=True, Supplier="Future Electronics", TC1=0, TC2=0
T1 T2: library part CMP-07264-000001-1, "BMS XFORMER 1-CH 1000V AECQ +125", Isolation Voltage=4300VDC, Manufacturer=Bourns, Package=0, Temperature="-40°C to +125°C", Temperature Range High=+125°C, Temperature Range Low=-40°C, Automotive=Yes, Automotive Grade="Grade 1", Category=Trans, ComponentLink2Description=Datasheet, ComponentLink2URL=https://www.bourns.com/docs/product-datasheets/SM91502AL.pdf, Device Class L1="Passive Components", Device Class L2=Transformers, Device Class L3=unset, Digikey Description="BMS XFORMER 1-CH 1000V AECQ +125", Height=5.72mm, Insertion Loss=-0.25dB, Lead Free=Yes, Manufacturer Part Number=SM91502ALE, Octopart=https://octopart.com/sm91502ale-bourns-95732123, Return Loss=-22dB, RoHS=TRUE, Standoff Height=0.13mm, Turns Ratio=1:1
U1: library part CMP-09132-000002-1, "18 CHANNEL MULTICELL BATTERY STA", Manufacturer="Analog Devices", Max Junction Temp=+125°C, Max Supply Voltage=3.6V, Min Supply Voltage=2.7V, Nominal Supply Current=3-6.1uA, Output Voltage=5.7V, Package=LWE-64-05-08-1982, Temperature="-40°C to +125°C", Temperature Range Low=-40°C, Automotive=Yes, Automotive Grade="Grade 1", Category=IC, ComponentLink2Description=Datasheet, ComponentLink2URL=https://www.analog.com/media/en/technical-documentation/data-sheets/LTC6813-1.pdf, Device Class L1="Integrated Circuits (ICs)", Device Class L2="Power Management ICs", Device Class L3="Battery Management", Digikey Description="18 CHANNEL MULTICELL BATTERY STA", Height=1.6mm, Ipc Land Pattern Name=QFP50P1200X1200X160-64, Lead Free=Yes, Manufacturer Part Number=LTC6813HLWE-1#3ZZPBF, Number Of Cells=18, Number Of Outputs=1, Octopart=https://octopart.com/ltc6813hlwe-1%233zzpbf-analog+devices-90390400, RoHS=TRUE, Standoff Height=0.05mm, Temperature Range High=+125°C
Z1 Z2 Z3 Z4 Z5 Z6 Z7 Z8 Z9 Z10 Z11 Z12 Z13 Z14 Z15 Z16 Z17 Z18: "Zener Diode", Manufacturer_Name=Nexperia, Mouser Part Number=771-PDZ75B115, Arrow Part Number=PDZ7.5B,115, Arrow Price/Stock=https://www.arrow.com/en/products/pdz7.5b115/nexperia, Datasheet Link=https://assets.nexperia.com/documents/data-sheet/PDZ-B_SER.pdf, Height=1.1mm, Manufacturer_Part_Number=PDZ7.5B,115, Mouser Price/Stock=https://www.mouser.co.uk/ProductDetail/Nexperia/PDZ75B115?qs=LOCUfHb8d9tcy1Hn7wNhcw%3D%3D
C37 C38 C39 C40 C41 C42 C43 C44 C45 C46 C47 C48 C49 C50 C51 C52: SimulationGenericComponent=True
R1 R2 R3 R4 R5 R6 R7 R8 R10 R11 R12 R13 R14 R15 R16 R17 R18 R19 R20 R21 R22 R23 R24 R25 R26 R27 R28 R29 R30 R31 R32 R33 R34 R35 R36 R37 R38 R39 R40 R41 R42 R43 R44 R45 R46 R47 R48 R49 R50 R51 R52 R53 R54 R55 R56 R57 R58 R59 R60 R61 R62 R63 R64 R65 R66 R67 R68 R69 R70 R71 R72 R73 R74 R75 R76 R77 R78 R79 R80 R81 R82 R83 R84 R85 R86 R87 R88 R89 R90 R91 R92 R94 R95 R96 R97: SimulationGenericComponent=True, TC1=0, TC2=0

## Free pads (board coordinates)
  round 200 hole 133.86: PTH3(194,1331) PTH3(194,8146) PTH3(385,-1123) PTH3(420,-1113) PTH3(4849,8161) PTH3(4854,1291)

## Via types
v1: diameter 25, hole 14, Top Layer to Bottom Layer, tented both sides, 109 vias
v2: diameter 50, hole 28, Top Layer to Bottom Layer, tented both sides, 8 vias

## Nets (pads, with @x,y where several pads share a name; then routed paths per layer and width w, separated by ;. In a path a pad name is that pad's centre, name@x,y a point inside that pad or via, vN(x,y) a via of type N, cw(c..) or ccw(c..) an arc to the next point about the centre after c; other vN are vias at no path point)
C1: C21.2 R38.1 U1.36 Z1.1 Z2.2 | length 2014.9
  Top Layer w10: U1.36@2233.66,4966.97 2233.66,4977.3 2415,5158.64 2415,5880 2773.83,6238.83 C21.2@2897.72,6238.83 2902.48,6234.07 2940.93,6234.07 2952.32,6222.68 Z1.1@2999.84,6222.68 ; Z2.2@3000,6050.28 v1(3000,6100) ; v1(3000,6170) Z1.1@3000,6219.72 3000,6222.2 3000.16,6222.36 3110.87,6222.36 R38.1@3113.5,6225
  Bottom Layer w10: v1(3000,6100) v1(3000,6170)
C2: C18.2 R26.1 U1.34 Z2.1 Z3.2 | length 1769.7
  Top Layer w10: U1.34@2272.95,4946.38 2273.03,4946.46 2273.03,4974.24 2445,5146.21 2445,5665 2760.22,5980.22 C18.2@2897.72,5980.22 2902.48,5975.45 2944.11,5975.45 2959.84,5959.72 Z2.1@3000,5959.72 ; v1(3000,5840) 3000.75,5839.25 3000.75,5791.02 Z3.2@3001.5,5790.28 ; v1(3000,5910) Z2.1@3000,5959.72 ; R26.1@3113.5,5965 3017.57,5965 3017.46,5964.88 3005.16,5964.88 Z2.1@3000,5959.72
  Bottom Layer w10: v1(3000,5840) v1(3000,5910)
C3: C15.2 R14.1 U1.32 Z3.1 Z4.2 | length 1568.6
  Top Layer w10: U1.32@2371.38,4867.64 2405.21,4867.64 2475,4937.43 2475,5435 2756.61,5716.61 C15.2@2899.21,5716.61 2943.39,5716.61 2960.28,5699.72 Z3.1@3001.5,5699.72 ; v1(3000,5580) 3000.75,5579.25 3000.75,5530.75 Z4.2@3001.5,5530 ; v1(3000,5650) 3000.75,5650.75 3000.75,5698.98 Z3.1@3001.5,5699.72 ; R14.1@3115,5705 3115,5702.05 3112.68,5699.72 Z3.1@3001.5,5699.72
  Bottom Layer w10: v1(3000,5580) v1(3000,5650)
C4: C12.2 R2.1 U1.30 Z4.1 Z5.2 | length 1334.6
  Top Layer w10: U1.30@2391.97,4828.27 2408.27,4828.27 2505,4925 2505,5210 2753,5458 C12.2@2904.21,5458 2947,5458 2965.55,5439.45 Z4.1@3001.5,5439.45 ; Z5.2@3005,5270.28 3003.25,5272.03 3005,5273.78 v1(3005,5315) ; v1(3005,5390) 3003.25,5391.75 3003.25,5437.7 Z4.1@3001.5,5439.45 ; R2.1@3115,5445 3115,5442.05 3112.4,5439.45 Z4.1@3001.5,5439.45
  Bottom Layer w10: v1(3005,5315) v1(3005,5390)
C5: C8.2 R3.1 U1.28 Z5.1 Z6.2 | length 1148.5
  Top Layer w10: U1.28@2371.38,4788.9 2411.32,4788.9 2535,4912.57 2535,5006.21 2728.17,5199.39 C8.2@2902.72,5199.39 2935.61,5199.39 2955.28,5179.72 Z5.1@3005,5179.72 ; Z6.2@3005,5010.28 v1(3005,5055) ; v1(3005,5135) Z5.1@3005,5179.72 ; R3.1@3113.5,5185 3113.5,5182.05 3111.18,5179.72 Z5.1@3005,5179.72
  Bottom Layer w10: v1(3005,5055) v1(3005,5135)
C6: C35.2 R66.1 U1.26 Z6.1 Z7.2 | length 999.6
  Top Layer w10: U1.26@2371.38,4749.53 2414.53,4749.53 2600.77,4935.77 C35.2@2902.72,4935.77 2944.23,4935.77 2960.28,4919.72 Z6.1@3005,4919.72 ; Z7.2@3005,4750 v1(3005,4795) ; v1(3005,4875) Z6.1@3005,4919.72 ; R66.1@3113.5,4925 3113.5,4922.05 3111.18,4919.72 Z6.1@3005,4919.72
  Bottom Layer w10: v1(3005,4795) v1(3005,4875)
C7: C31.2 R58.1 U1.24 Z7.1 Z8.2 | length 936.8
  Top Layer w10: U1.24@2371.38,4710.16 2799.84,4710.16 2833.11,4676.89 C31.2@2902.72,4676.89 2943.11,4676.89 2960.55,4659.45 Z7.1@3005,4659.45 ; v1(3005,4540) 3005.75,4539.25 3005.75,4491.02 Z8.2@3006.5,4490.28 ; v1(3005,4615) Z7.1@3005,4659.45 ; R58.1@3113.5,4664.72 3113.5,4661.77 3111.18,4659.45 Z7.1@3005,4659.45
  Bottom Layer w10: v1(3005,4540) v1(3005,4615)
C8: C26.2 R44.1 U1.22 Z8.1 Z9.2 | length 1030.9
  Top Layer w10: U1.22@2371.38,4670.79 2441.49,4670.79 2552.28,4560 2625,4560 2766.45,4418.55 C26.2@2904.21,4418.55 2941.45,4418.55 2960.28,4399.72 Z8.1@3006.5,4399.72 ; v1(3005,4275) Z9.2@3005,4230.28 Z9.2@3005.75,4231.02 ; v1(3006.15,4354.71) 3006.32,4354.88 3006.32,4399.55 Z8.1@3006.5,4399.72 ; R44.1@3115,4405 3115,4402.05 3112.68,4399.72 Z8.1@3006.5,4399.72
  Bottom Layer w10: v1(3005,4275) 3005.57,4275.57 3005.57,4354.13 v1(3006.15,4354.71)
C9: C17.2 R27.1 U1.20 Z9.1 Z10.2 | length 1123.9
  Top Layer w10: U1.20@2371.38,4631.42 2391.89,4631.42 2396.65,4626.65 2401.24,4626.65 2871.3,4156.59 2901.06,4156.59 C17.2@2902.72,4154.94 ; C17.2@2898.98,4154.94 2940.06,4154.94 2955,4140 3004.72,4140 Z9.1@3005,4139.72 ; Z10.2@3005,3970.28 v1(3005,4020) ; v1(3006.19,4089.98) 3005.59,4090.58 3005.59,4139.13 Z9.1@3005,4139.72 ; R27.1@3113.5,4145 3113.5,4142.05 3111.18,4139.72 Z9.1@3005,4139.72
  Bottom Layer w10: v1(3005,4020) 3005.59,4020.59 3005.59,4089.39 v1(3006.19,4089.98)
C10: C9.2 R4.1 U1.18 Z10.1 Z11.2 | length 1335.4
  Top Layer w10: U1.18@2371.38,4592.05 2391.89,4592.05 2396.65,4587.28 2398.18,4587.28 2860.38,4125.08 2860.38,3909.62 2873.67,3896.33 2943.67,3896.33 2960,3880 3004.72,3880 Z10.1@3005,3879.72 ; Z11.2@3004.79,3711.75 3004.9,3711.86 3004.9,3759.9 v1(3005,3760) ; v1(3005,3835) Z10.1@3005,3879.72 ; R4.1@3113.5,3885 3113.5,3882.05 3111.18,3879.72 Z10.1@3005,3879.72
  Bottom Layer w10: v1(3005,3760) v1(3005,3835)
C11: C36.2 R67.1 U1.16 Z11.1 Z12.2 | length 1627.4
  Top Layer w10: U1.16@2292.64,4493.62 2292.64,4463 2298.5,4457.14 2483.64,4457.14 2830.38,4110.4 2830.38,3679.62 2870.8,3639.2 2950.81,3639.2 2968.8,3621.2 Z11.1@3004.79,3621.2 ; Z12.2@3004.9,3450.38 Z12.2@3005,3450.28 v1(3005,3495) ; v1(3005,3575) 3004.9,3575.1 3004.9,3621.1 Z11.1@3004.79,3621.2 ; R67.1@3113.3,3626.48 3113.3,3623.52 3110.97,3621.2 Z11.1@3004.79,3621.2
  Bottom Layer w10: v1(3005,3495) v1(3005,3575)
C12: C32.2 R59.1 U1.14 Z12.1 Z13.2 | length 1881
  Top Layer w10: U1.14@2253.35,4473.03 2253.35,4459.87 2286.07,4427.14 2471.22,4427.14 2800.38,4097.98 2800.38,3451.14 2869.21,3382.31 2894.52,3382.31 C32.2@2902.72,3374.11 2940.89,3374.11 2955,3360 3004.72,3360 Z12.1@3005,3359.72 ; Z13.2@3005,3190.55 v1(3005,3240) ; v1(3005,3315) Z12.1@3005,3359.72 ; R59.1@3113.5,3365 3113.5,3362.05 3111.18,3359.72 Z12.1@3005,3359.72
  Bottom Layer w10: v1(3005,3240) v1(3005,3315)
C13: C27.2 R45.1 U1.12 Z13.1 Z14.2 | length 2164.4
  Top Layer w10: U1.12@2213.9,4473.03 2213.9,4456.52 2273.28,4397.14 2458.79,4397.14 2770.38,4085.55 2770.38,3438.71 2820,3389.09 2820,3160 2869.23,3110.77 2948.94,3110.77 2959.72,3100 Z13.1@3005,3100 ; Z14.2@3005,2930.55 v1(3005,2980) ; v1(3005,3055) Z13.1@3005,3100 ; R45.1@3113.5,3105 3113.5,3102.05 3111.46,3100 Z13.1@3005,3100
  Bottom Layer w10: v1(3005,2980) v1(3005,3055)
C14: C19.2 R28.1 U1.10 Z14.1 Z15.2 | length 2445.1
  Top Layer w10: U1.10@2174.53,4493.62 2174.53,4453.47 2260.85,4367.14 2446.36,4367.14 2740.38,4073.13 2740.38,3426.28 2790,3376.67 2790,2966.14 2898.98,2857.16 C19.2@2902.72,2857.16 2947.84,2857.16 2965,2840 Z14.1@3005,2840 ; Z15.2@3005,2665.55 v1(3005,2715) ; v1(3005,2795) Z14.1@3005,2840 ; R28.1@3113.5,2845 3113.5,2842.05 3111.46,2840 Z14.1@3005,2840
  Bottom Layer w10: v1(3005,2715) v1(3005,2795)
C15: C10.2 R6.1 U1.8 Z15.1 Z16.2 | length 2725.6
  Top Layer w10: U1.8@2135.16,4493.62 2135.16,4450.41 2248.43,4337.14 2433.94,4337.14 2710.38,4060.7 2710.38,3413.86 2760,3364.24 2760,2732.53 2898.98,2593.55 C10.2@2902.72,2593.55 2936.45,2593.55 2955,2575 Z15.1@3005,2575 ; Z16.2@3005,2400.55 v1(3005,2450) ; v1(3005,2525) Z15.1@3005,2575 ; R6.1@3113.5,2580 3113.5,2577.05 3111.46,2575 Z15.1@3005,2575
  Bottom Layer w10: v1(3005,2450) v1(3005,2525)
C16: C28.2 R47.1 U1.6 Z16.1 Z17.2 | length 3009
  Top Layer w10: U1.6@2095.79,4493.62 2095.79,4447.36 2236,4307.14 2421.51,4307.14 2680.38,4048.27 2680.38,3401.43 2730,3351.81 2730,2493.92 2898.98,2324.94 C28.2@2902.72,2324.94 2945.84,2324.94 2960.78,2310 Z16.1@3005,2310 ; Z17.2@3005,2135.55 v1(3005,2185) ; v1(3005,2260) Z16.1@3005,2310 ; R47.1@3113.5,2315 3113.5,2312.05 3111.46,2310 Z16.1@3005,2310
  Bottom Layer w10: v1(3005,2185) v1(3005,2260)
C17: C20.2 R30.1 U1.4 Z17.1 Z18.2 | length 3289.5
  Top Layer w10: U1.4@2056.42,4493.62 2056.42,4444.3 2223.57,4277.14 2409.08,4277.14 2650.38,4035.85 2650.38,3389.01 2700,3339.39 2700,2260.3 2898.98,2061.33 C20.2@2902.72,2061.33 2938.67,2061.33 2955,2045 Z17.1@3005,2045 ; Z18.2@3005,1870.55 v1(3005,1920) ; v1(3005,1995) Z17.1@3005,2045 ; R30.1@3113.5,2050 3113.5,2047.05 3111.46,2045 Z17.1@3005,2045
  Bottom Layer w10: v1(3005,1920) v1(3005,1995)
C18: C11.2 R7.1 U1.2 Z18.1 | length 3411.9
  Top Layer w10: U1.2@2017.05,4493.62 2017.05,4441.24 2211.15,4247.14 2396.66,4247.14 2620.38,4023.42 2620.38,3376.58 2670,3326.96 2670,1998.79 2866.07,1802.72 C11.2@2902.72,1802.72 2937.28,1802.72 2960,1780 Z18.1@3005,1780 3111.46,1780 3113.5,1782.05 R7.1@3113.5,1785
Cell1: F1.1 J4.2 | length 1515.9
  Top Layer w30: F1.1@4080,6291.75 4080.75,6291 4102.71,6291 4400,5993.71 4400,5070.7 4499.12,4971.58 J4.2@4508.42,4971.58
Cell1_F: C0.2 C1.1 F1.2 LED2.1 Q1.2 R35.2 R38.2 | length 1421.8
  Top Layer w10: R38.2@3176.5,6225 Q1.2@3259.09,6225 ; LED2.1@3525,6022.56 3525,6155
  Top Layer w30: Q1.2@3259.09,6225 Q1.2@3261.69,6227.6 3334.29,6155 3525,6155 3904.29,6155 C0.2@3975,6225.71 ; R35.2@3880.08,6005 R35.2@3890.53,6015.45 ; R35.2@3880.08,6025.91 R35.2@3880.08,6050.28 ; R35.2@3886.73,6032.56 C1.1@3975,6032.56 C0.2@3975,6225.71 ; C0.2@3990,6237.44 3986.73,6237.44 C0.2@3975,6225.71 ; C0.2@3990,6238.25 F1.2@4080,6238.25
Cell2: F2.1 J4.3 | length 1359.8
  Top Layer w30: F2.1@4080,6031.75 4080.75,6031 4102.71,6031 4345,5788.71 4345,5035 J4.3@4515,4865
Cell2_F: C1.2 C2.1 F2.2 LED3.1 Q2.2 R23.2 R26.2 | length 1396.4
  Top Layer w10: R26.2@3177.24,5967.6 Q2.2@3261.69,5967.6 ; LED3.1@3525,5775.12 3525,5895
  Top Layer w30: R26.2@3176.5,5965 3176.5,5966.85 R26.2@3177.24,5967.6 ; Q2.2@3261.69,5967.6 3334.29,5895 3525,5895 3910,5895 3971.5,5956.5 ; R23.2@3880.08,5750 3880.08,5770.91 3886.73,5777.56 C2.1@3975,5777.56 C1.2@3975,5977.44 3975.24,5977.68 4079.43,5977.68 F2.2@4080,5978.25
Cell3: F3.1 J4.4 | length 1204.8
  Top Layer w30: F3.1@4080,5776.75 4080.75,5776 4102.71,5776 4290,5588.71 4290,4990 J4.4@4515,4765
Cell3_F: C2.2 C3.1 F3.2 LED4.1 Q3.2 R11.2 R14.2 | length 1412.2
  Top Layer w10: R14.2@3177.99,5705 Q3.2@3259.09,5705 ; LED4.1@3525,5515.12 3525,5630
  Top Layer w30: Q3.2@3259.09,5705 Q3.2@3261.69,5707.6 3339.29,5630 3525,5630 3879.29,5630 3971.73,5722.44 C2.2@3975,5722.44 ; R11.2@3880.08,5490 3880.08,5510.91 3886.73,5517.56 C3.1@3975,5517.56 C2.2@3975,5722.44 ; F3.2@4080,5723.25 4079.43,5722.68 3975.24,5722.68 C2.2@3975,5722.44
Cell4: F4.1 J4.5 | length 1044.8
  Top Layer w30: F4.1@4080,5516.75 4080.75,5516 4102.71,5516 4235,5383.71 4235,4945 J4.5@4515,4665
Cell4_F: C3.2 C4.1 F4.2 LED5.1 Q4.2 R2.2 R21.2 | length 1377.9
  Top Layer w10: R2.2@3177.99,5445 Q4.2@3259.09,5445 ; LED5.1@3525,5255 3525,5375
  Top Layer w30: Q4.2@3259.09,5445 Q4.2@3261.69,5447.6 3334.29,5375 3525,5375 3884.29,5375 3971.73,5462.44 C3.2@3975,5462.44 ; R21.2@3890.87,5265 C4.1@3979.13,5265 ; C4.1@3975,5262.56 C3.2@3975,5462.44 ; F4.2@4080,5463.25 4079.43,5462.68 3975.24,5462.68 C3.2@3975,5462.44
Cell5: F5.1 J4.6 | length 889.8
  Top Layer w30: F5.1@4080,5261.75 4080.75,5261 4102.71,5261 4185,5178.71 4185,4895 J4.6@4515,4565
Cell5_F: C4.2 C33.1 F5.2 LED6.1 Q5.2 R3.2 R72.2 | length 1391.3
  Top Layer w10: R3.2@3176.5,5185 Q5.2@3259.09,5185 ; LED6.1@3525,4995.12 3525,5115
  Top Layer w30: Q5.2@3259.09,5185 Q5.2@3261.69,5187.6 3334.29,5115 3525,5115 3879.29,5115 3971.73,5207.44 C4.2@3975,5207.44 ; R72.2@3890.87,5000 C33.1@3979.13,5000 ; C33.1@3975,4997.56 C4.2@3975,5207.44 ; F5.2@4080,5208.25 4079.43,5207.68 3975.24,5207.68 C4.2@3975,5207.44
Cell6: F6.1 J4.7 | length 724.8
  Top Layer w30: F6.1@4080,4996.75 4080.75,4996 4102.71,4996 4135,4963.71 4135,4845 J4.7@4515,4465
Cell6_F: C29.1 C33.2 F6.2 LED7.1 Q6.2 R64.2 R66.2 | length 1384.2
  Top Layer w10: R66.2@3176.5,4925 Q6.2@3259.09,4925 ; LED7.1@3525,4735.12 3525,4855
  Top Layer w30: Q6.2@3259.09,4925 Q6.2@3261.69,4927.6 3334.29,4855 3525,4855 3884.29,4855 3971.73,4942.44 C33.2@3975,4942.44 ; R64.2@3885.87,4735 C29.1@3974.13,4735 ; C29.1@3975,4737.56 C33.2@3975,4942.44 ; F6.2@4080,4943.25 4079.43,4942.68 3975.24,4942.68 C33.2@3975,4942.44
Cell7: F7.1 J4.8 | length 589
  Top Layer w30: F7.1@4080,4736.75 4143.25,4736.75 J4.8@4515,4365
Cell7_F: C23.1 C29.2 F7.2 LED8.1 Q7.2 R55.2 R58.2 | length 1386.9
  Top Layer w10: R58.2@3176.5,4664.72 Q7.2@3258.82,4664.72 ; LED8.1@3525,4472.56 3525,4595
  Top Layer w30: Q7.2@3258.82,4664.72 Q7.2@3261.69,4667.6 3334.29,4595 3525,4595 3884.29,4595 3971.73,4682.44 C29.2@3975,4682.44 ; R55.2@3885.87,4475 C23.1@3974.13,4475 ; C23.1@3975,4477.56 C29.2@3975,4682.44 ; F7.2@4080,4683.25 4079.43,4682.68 3975.24,4682.68 C29.2@3975,4682.44
Cell8: F8.1 J4.9 | length 522.7
  Top Layer w30: F8.1@4080,4476.75 4303.25,4476.75 J4.9@4515,4265
Cell8_F: C14.1 C23.2 F8.2 LED9.1 Q8.2 R40.2 R44.2 | length 1382
  Top Layer w10: R44.2@3177.99,4405 Q8.2@3259.09,4405 ; LED9.1@3525,4215 3525,4330
  Top Layer w30: Q8.2@3259.09,4405 Q8.2@3261.69,4407.6 3339.29,4330 3525,4330 3879.29,4330 3971.73,4422.44 C23.2@3975,4422.44 ; R40.2@3885.87,4215 C14.1@3974.13,4215 ; C14.1@3975,4217.56 C23.2@3975,4422.44 ; F8.2@4080,4423.25 4079.43,4422.68 3975.24,4422.68 C23.2@3975,4422.44
Cell9: F9.1 J4.10 | length 456.4
  Top Layer w30: F9.1@4080,4216.75 4457.59,4216.75 4509.34,4165 J4.10@4515,4165
Cell9_F: C5.1 C14.2 F9.2 LED10.1 Q9.2 R22.2 R27.2 | length 1386.8
  Top Layer w10: R27.2@3176.5,4145 Q9.2@3259.09,4145 ; LED10.1@3525,3952.56 3525,4075
  Top Layer w30: Q9.2@3259.09,4145 Q9.2@3261.69,4147.6 3334.29,4075 3525,4075 3884.29,4075 3971.73,4162.44 C14.2@3975,4162.44 ; R22.2@3890.87,3960 C5.1@3979.13,3960 ; C5.1@3975,3957.56 C14.2@3975,4162.44 ; F9.2@4080,4163.25 4079.43,4162.68 3975.24,4162.68 C14.2@3975,4162.44
Cell10: F10.1 J4.11 | length 479.8
  Top Layer w30: F10.1@4080,3956.75 4406.75,3956.75 J4.11@4515,4065
Cell10_F: C5.2 C34.1 F10.2 LED11.1 Q10.2 R4.2 R73.2 | length 1390.9
  Top Layer w10: R4.2@3176.5,3885 Q10.2@3259.09,3885 ; LED11.1@3525,3692.56 3525,3810
  Top Layer w30: Q10.2@3259.09,3885 Q10.2@3261.69,3887.6 3339.29,3810 3525,3810 3879.29,3810 3971.73,3902.44 C5.2@3975,3902.44 ; R73.2@3885.87,3690 C34.1@3974.13,3690 ; C34.1@3975,3692.56 C5.2@3975,3902.44 ; F10.2@4080,3903.25 4079.43,3902.68 3975.24,3902.68 C5.2@3975,3902.44
Cell11: F11.1 J4.12 | length 548.2
  Top Layer w30: F11.1@4080,3691.75 4241.75,3691.75 J4.12@4515,3965